# EAGLE board full_motor (EAGLE 7.5.0)
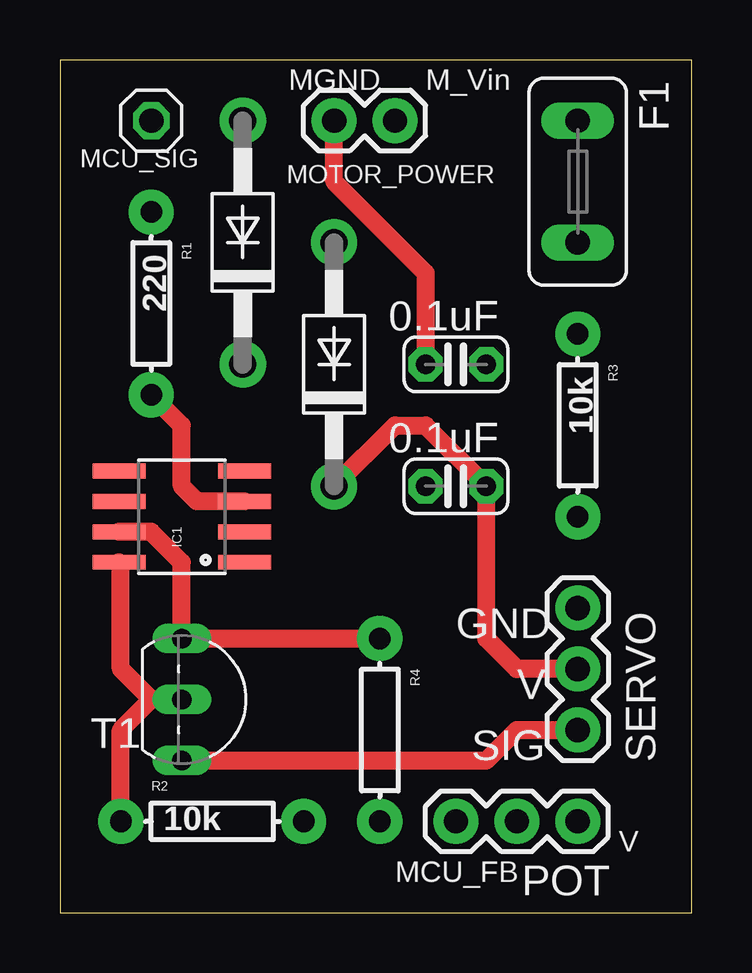
[diagram p0: board, top side]
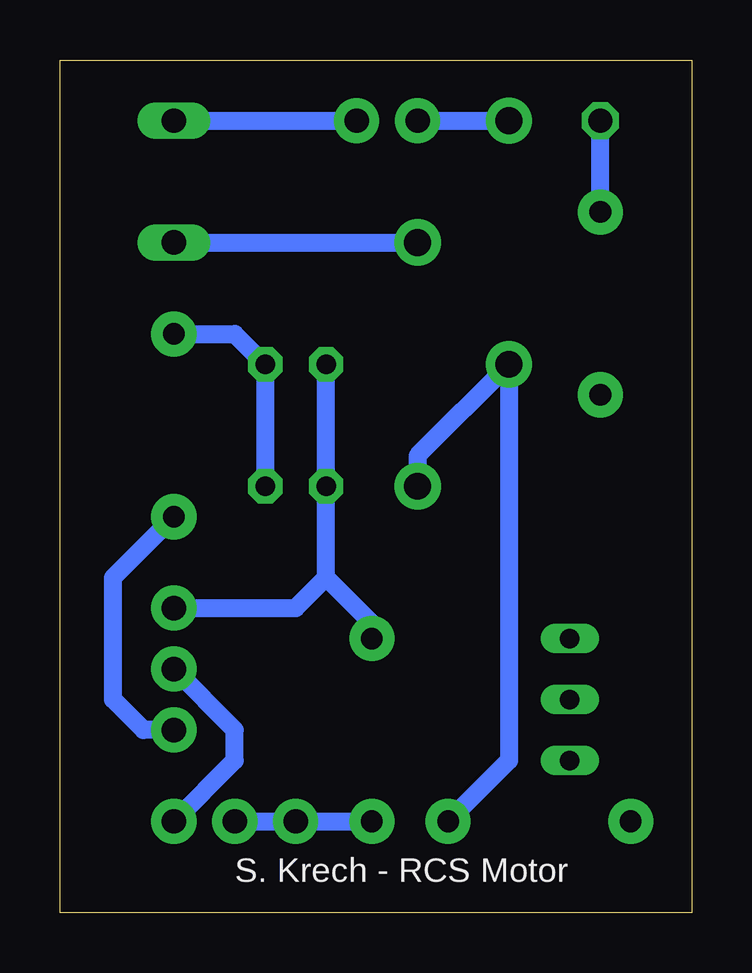
[diagram p1: board, bottom side, seen from below]

Size 26.34 x 35.55 mm. Coordinates in mm from the lower left corner, seen from the top.
Outline: 0,0 26.34,0 26.34,35.55 0,35.55 0,0
Copper layers (1*16): Top 0.0356mm / dielectric 1.5011mm / Bottom 0.0356mm
Design rules "LaenPCBOrder": minimum track width 6mil, minimum drill 13mil, track to track 6mil, track to pad 6mil, pad to pad 6mil, via to via 6mil, smd to smd 6mil, copper to edge 15mil, drill to drill 6mil, minimum pad ring 7mil, minimum via ring 7mil, stop-mask expansion 3mil, vias tented up to drill 0mil, thermal gap 10mil

## Footprints (pad centres in the part's own frame; a part is rotated, then mirrored left to right if it is on the bottom)
C025-024X044 = drill 0.813 pad 1.422 octagon: 1 -1.27,0; 2 1.27,0
DO41-10 = drill 1.118 pad 1.93: A 5.08,0; C -5.08,0
TE5 = drill 1.016 long: 1 -2.54,0; 2 2.54,0
SO08 = smd 0.61 x 2.21: 1 -1.905,-2.616; 2 -0.635,-2.616; 3 0.635,-2.616; 4 1.905,-2.616; 5 1.905,2.616; 6 0.635,2.616; 7 -0.635,2.616; 8 -1.905,2.616
1X01 = drill 1.016 octagon: 1 0,0
1X02 = drill 1.016 pad 1.88: 1 0,0; 2 2.54,0
1X03 = drill 1.016 pad 1.88: 1 0,0; 2 2.54,0; 3 5.08,0
AXIAL-0.3EZ = drill 0.9 pad 1.88: P$1 -3.81,0; P$2 3.81,0
TO92-EBC-OVAL = drill 0.813 long: B 0,-1.27; C 2.54,-1.27; E -2.54,-1.27

## Placement (x,y rotation side)
C1  0.1uF  [C025-024X044]  16.51,22.86 180 top
C2  0.1uF  [C025-024X044]  16.51,17.78 180 top
D3  1N4004  [DO41-10]  11.43,22.86 90 top
D4  1N4004  [DO41-10]  7.62,27.94 90 top
F1  3A  [TE5]  21.59,30.48 270 top
IC1  ILD213T  [SO08]  5.08,16.51 90 top
MCU_SIG  [1X01]  3.81,33.02 0 top
MOTOR_POWER  [1X02]  13.97,33.02 180 top
POT  [1X03]  21.59,3.81 180 top
R1  220  [AXIAL-0.3EZ]  3.81,25.4 270 top
R2  10k  [AXIAL-0.3EZ]  6.35,3.81 0 top
R3  10k  [AXIAL-0.3EZ]  21.59,20.32 270 top
R4  [AXIAL-0.3EZ]  13.33,7.62 270 top
SERVO  SMALL_SERVO  [1X03]  21.59,7.62 90 top
T1  2N2222  [TO92-EBC-OVAL]  6.35,8.89 270 top

## Library data of the parts
C1 C2 D3 D4 T1 = adafruit
F1 = fuse; OC_FARNELL: unknown; OC_NEWARK: unknown
IC1 = SparkFun-DiscreteSemi
MCU_SIG = pinhead
MOTOR_POWER POT = SparkFun-Connectors
R1-R4 = SparkFun-Passives
SERVO = SparkFun-Electromechanical

## Nets
6V_POWER: C1.1 C2.1 D3.C D4.C POT.1 R2.P$2 R3.P$1 SERVO.2
GND: IC1.4
GND_MOTOR: C1.2 C2.2 D4.A IC1.7 MOTOR_POWER.2 R4.P$1 SERVO.3 T1.E
MCU_FEEDBACK: POT.2 POT.3 R4.P$2
N$1: IC1.3 R1.P$2
N$3: IC1.8 R2.P$1 T1.B
N$4: D3.A F1.2
N$6: R3.P$2 SERVO.1 T1.C
TO_MCU: MCU_SIG.1 R1.P$1
TO_POWER_6V: F1.1 MOTOR_POWER.1

## Tracks (layer width: path | path; a pad name or v marks a point on that pad's centre or on a via)
6V_POWER
  Top 0.759: SERVO.2 19.05,10.16 17.78,11.43 C2.1 15.24,20.32 13.97,20.32 D3.C
  Bottom 0.759: R3.P$1 19.05,24.13 C1.1 C2.1 | POT.1 19.05,6.35 19.05,7.62 SERVO.2 | R2.P$2 7.62,6.35 D4.C 11.43,19.05 D3.C
GND_MOTOR
  Top 0.759: C1.2 15.24,26.67 11.43,30.48 MOTOR_POWER.2 | R4.P$1 T1.E 5.08,14.61 3.81,15.88 IC1.7
  Bottom 0.759: MOTOR_POWER.2 D4.A | C1.2 C2.2 15.24,13.97 | SERVO.3 16.51,12.7 15.24,13.97 | R4.P$1 13.33,12.06 15.24,13.97
MCU_FEEDBACK
  Bottom 0.759: POT.2 POT.3 R4.P$2
N$1
  Top 0.759: IC1.3 5.71,17.14 5.08,17.78 5.08,20.32 R1.P$2
N$3
  Top 0.759: T1.B 3.81,8.89 | 3.81,8.89 2.54,10.16 2.54,14.53 IC1.8 | R2.P$1 2.54,7.62 3.81,8.89
N$4
  Bottom 0.759: F1.2 D3.A
N$6
  Top 0.759: SERVO.1 19.05,7.62 17.78,6.35 T1.C
  Bottom 0.759: SERVO.1 22.86,7.62 24.13,8.89 24.13,13.97 R3.P$2
TO_MCU
  Bottom 0.759: R1.P$1 MCU_SIG.1
TO_POWER_6V
  Bottom 0.759: F1.1 MOTOR_POWER.1

## Text on the board
tNames: MGND | M_Vin | GND | V | SIG | V | MCU_FB
bNames: S. Krech - RCS Motor